# Allegro board ILI9488_TEST_V10A.brd
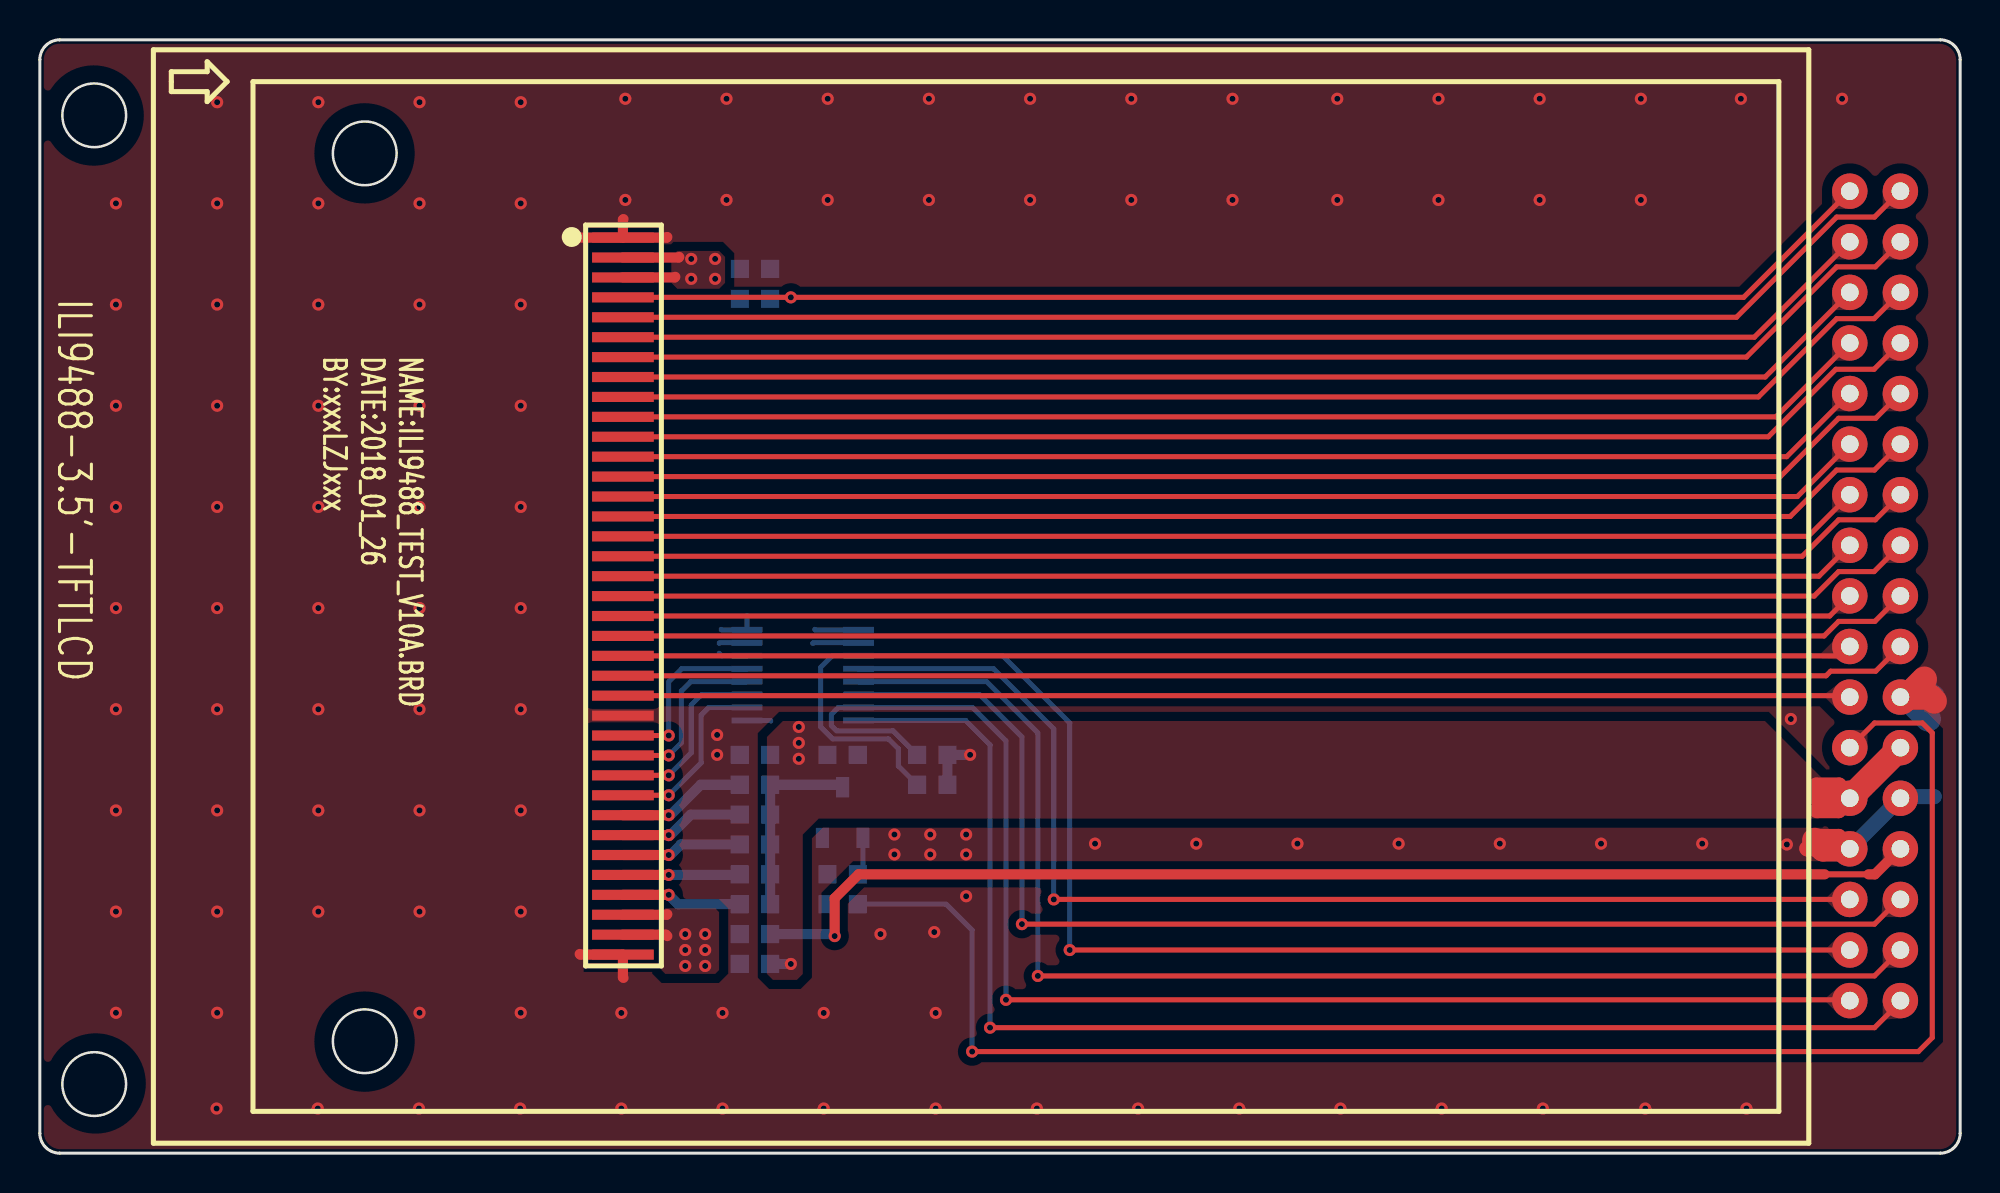
[diagram p0: board, top side]
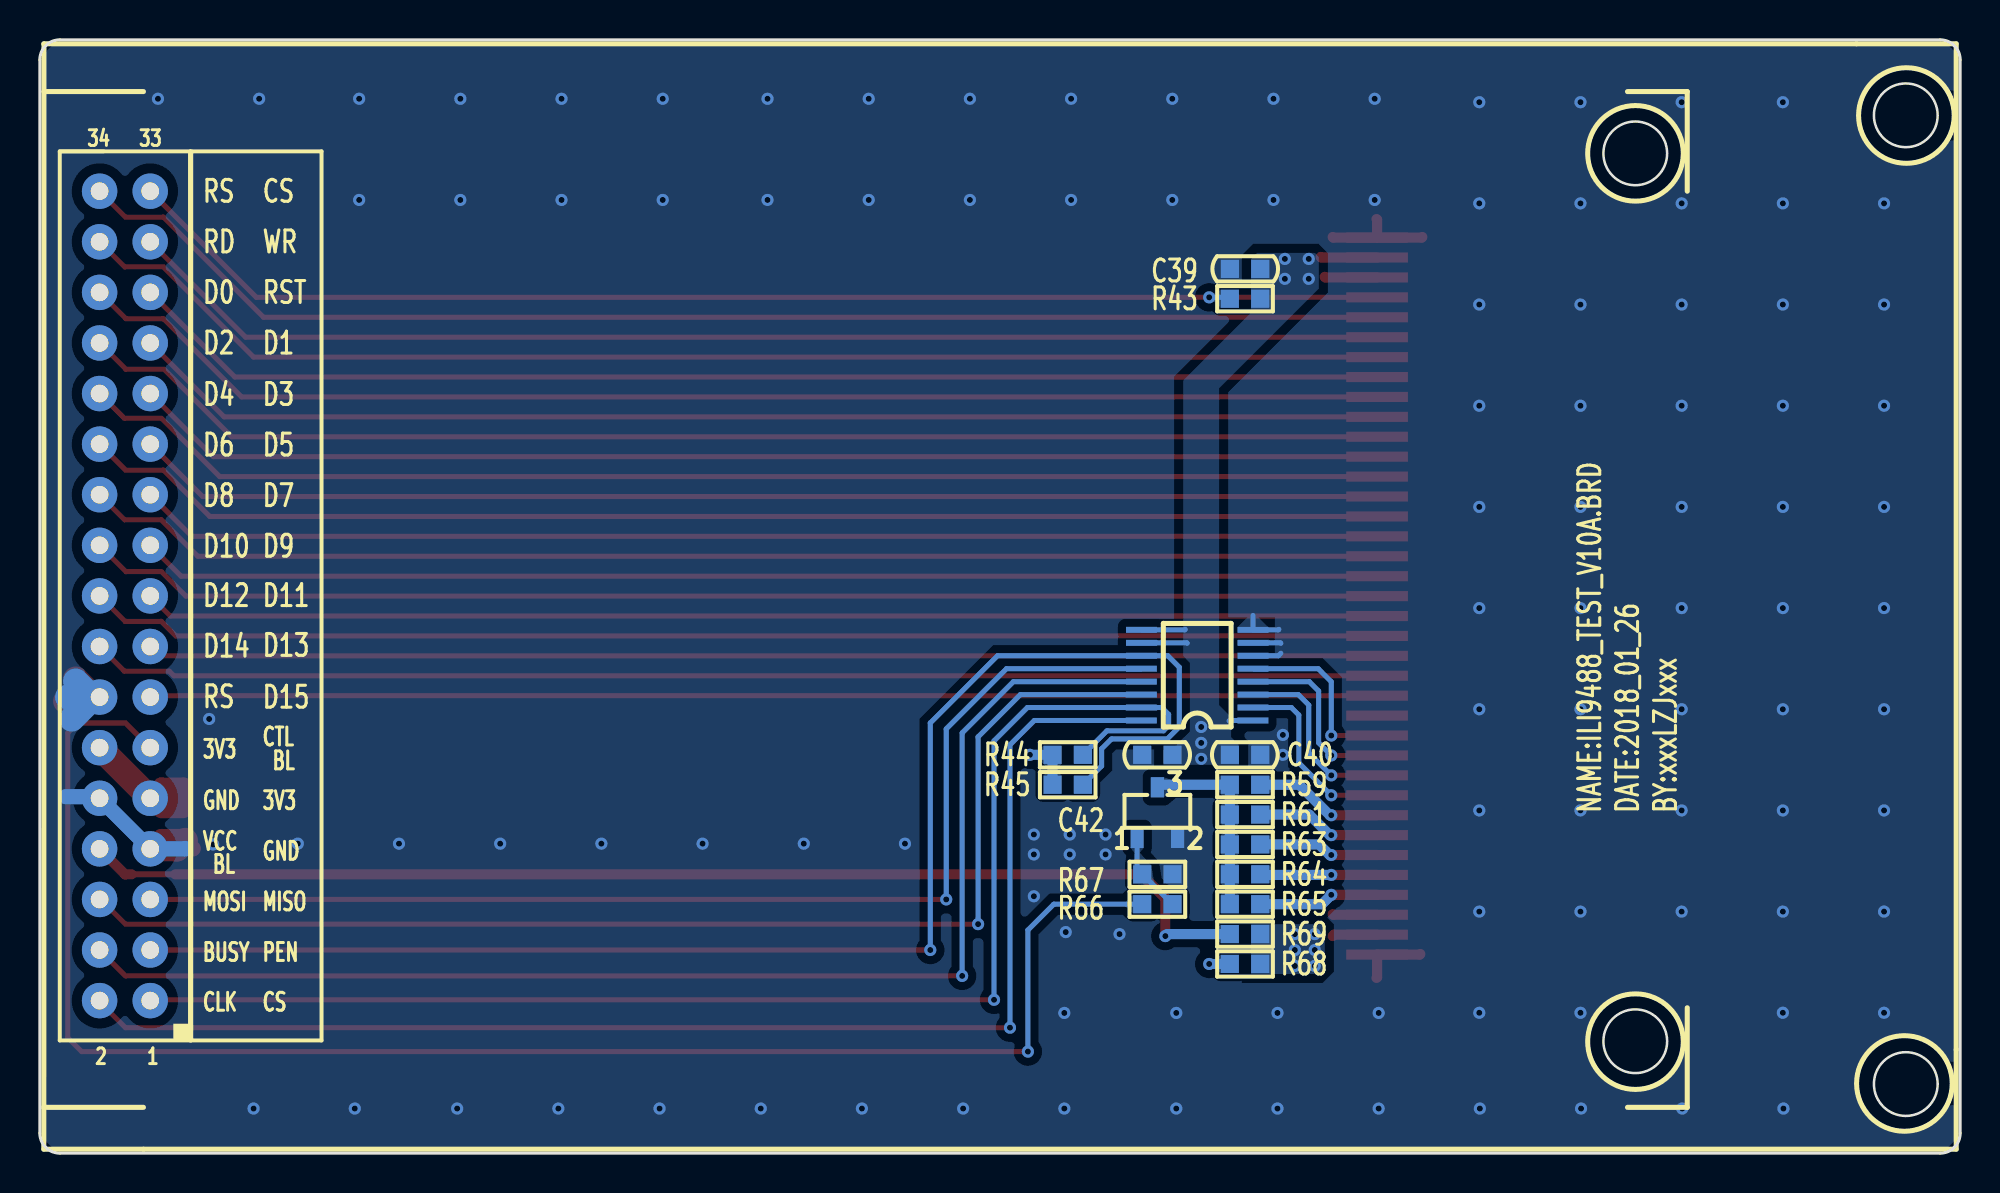
[diagram p1: board, bottom side, seen from below]

Outline 96.4 x 55.9 mm; copper layers: TOP, BOTTOM. Coordinates in mm from the lower left corner of the outline.
Outline path: 0,54.9 0,1 arc(0.29,0.29) 1,0 95.4,0 arc(96.11,0.29) 96.4,1 96.4,54.9 arc(96.11,55.61) 95.4,55.9 1,55.9 arc(0.29,55.61) 0,54.9

## Design rules (mm)
constraint set DEFAULT: min track width 0.203, pair gap 0.203

## Placement (name value [footprint] x y rotation side)
C39  0.1uF_50V  [CC0603]  35.9 44.4 180 bottom
C40  0.1uF_50V  [CC0603]  35.9 20 0 bottom
C42  0.1uF_50V  [CC0603]  40.3 20 0 bottom
J4  HEADER17X2_2R54  [TFTLCD_3R5]  93.4 48.3 180 bottom
NOREF  -  []  0 0 0 top
NOREF#2  -  []  0 0 90 top
Q3  S8050  [SOT23_123]  40.3 17.1 180 bottom
R43  100K  [RC0603]  35.9 42.9 0 bottom
R44  100K  [RC0603]  44.8 20 180 bottom
R45  100K  [RC0603]  44.8 18.5 180 bottom
R59  10R  [RC0603]  35.9 18.5 0 bottom
R61  10R  [RC0603]  35.9 17 0 bottom
R63  10R  [RC0603]  35.9 15.5 0 bottom
R64  10R  [RC0603]  35.9 14 0 bottom
R65  10R  [RC0603]  35.9 12.5 0 bottom
R66  1K  [RC0603]  40.3 12.5 180 bottom
R67  100K  [RC0603]  40.3 14 0 bottom
R68  0R/NI  [RC0603]  35.9 9.5 180 bottom
R69  0R  [RC0603]  35.9 11 180 bottom
U15  -  [TFT-3R5]  5.8 55.3 270 top
U16  XPT2046  [TSSOP-16]  38.3 24 90 bottom

## Library data of the parts
C39 C40 C42 = CAP NP
J4 = CONN RCPT 17x2
Q3 = L14G1/TO_1
R43-R45 R59 R61 R63-R69 = R_Generic
U15 = TFT-3R2
U16 = XPT2046

## Footprints (pads in the part's own frame, mm; a bottom-side part is the same pattern mirrored in y, then rotated)
CC0603
  rect 0.914x0.914 smd: 1(-0.762,0) 2(0.762,0)
RC0603
  rect 0.914x0.914 smd: 1(-0.762,0) 2(0.762,0)
SOT23_123
  rect 0.66x1.016 smd: 1(-1.016,-1.27) 2(1.016,-1.27) 3(0,1.27)
TFT-3R5
  rect 0.508x3.099 smd: 1(9.33,23.47) 2(10.33,23.47) 3(11.33,23.47) 4(12.33,23.47) 5(13.33,23.47) 6(14.33,23.47) 7(15.33,23.47) 8(16.33,23.47) 9(17.33,23.47) 10(18.33,23.47) 11(19.33,23.47) 12(20.33,23.47) 13(21.33,23.47) 14(22.33,23.47) 15(23.33,23.47) 16(24.33,23.47) 17(25.33,23.47) 18(26.33,23.47) 19(27.33,23.47) 20(28.33,23.47) 21(29.33,23.47) 22(30.33,23.47) 23(31.33,23.47) 24(32.33,23.47) 25(33.33,23.47) 26(34.33,23.47) 27(35.33,23.47) 28(36.33,23.47) 29(37.33,23.47) 30(38.33,23.47) 31(39.33,23.47) 32(40.33,23.47) 33(41.33,23.47) 34(42.33,23.47) 35(43.33,23.47) 36(44.33,23.47) 37(45.33,23.47)
TFTLCD_3R5
  round 1.778 hole 0.889: 1(2.54,-40.64) 2(0,-40.64) 3(2.54,-38.1) 4(0,-38.1) 5(2.54,-35.56) 6(0,-35.56) 7(2.54,-33.02) 8(0,-33.02) 9(2.54,-30.48) 10(0,-30.48) 11(2.54,-27.94) 12(0,-27.94) 13(2.54,-25.4) 14(0,-25.4) 15(2.54,-22.86) 16(0,-22.86) 17(2.54,-20.32) 18(0,-20.32) 19(2.54,-17.78) 20(0,-17.78) 21(2.54,-15.24) 22(0,-15.24) 23(2.54,-12.7) 24(0,-12.7) 25(2.54,-10.16) 26(0,-10.16) 27(2.54,-7.62) 28(0,-7.62) 29(2.54,-5.08) 30(0,-5.08) 31(2.54,-2.54) 32(0,-2.54) 33(2.54,0) 34(0,0)
TSSOP-16
  rect 0.3x1.55 smd: 1(-2.275,-2.8) 2(-1.625,-2.8) 3(-0.975,-2.8) 4(-0.325,-2.8) 5(0.325,-2.8) 6(0.975,-2.8) 7(1.625,-2.8) 8(2.275,-2.8) 9(2.275,2.8) 10(1.625,2.8) 11(0.975,2.8) 12(0.325,2.8) 13(-0.325,2.8) 14(-0.975,2.8) 15(-1.625,2.8) 16(-2.275,2.8)

## Nets
GND: C39.1 C40.1 C42.2 J4.7 J4.10 J4.14 Q3.2(E) R67.1 U15.1 U15.25 U15.37 U16.6 U16.7 U16.8
VCC_3.3V: C39.2 C40.2 C42.1 J4.9 J4.12 R43.1 R44.1 R45.1 R68.1 U15.2 U15.3 U16.1 U16.9 U16.10
VCC_BL: J4.8 R69.1
BL_CTL: J4.11 R66.1
LCD_CS: J4.33 R43.2 U15.4
LCD_D0: J4.30 U15.9
LCD_D1: J4.27 U15.10
LCD_D2: J4.28 U15.11
LCD_D3: J4.25 U15.12
LCD_D4: J4.26 U15.13
LCD_D5: J4.23 U15.14
LCD_D6: J4.24 U15.15
LCD_D7: J4.21 U15.16
LCD_D8: J4.22 U15.17
LCD_D9: J4.19 U15.18
LCD_D10: J4.20 U15.19
LCD_D11: J4.17 U15.20
LCD_D12: J4.18 U15.21
LCD_D13: J4.15 U15.22
LCD_D14: J4.16 U15.23
LCD_D15: J4.13 U15.24
LCD_RD: J4.32 U15.7
LCD_RS: J4.34 U15.5
LCD_RST: J4.29 U15.8
LCD_WR: J4.31 U15.6
LED-1: R59.1 U15.30
LED-2: R61.1 U15.31
LED-3: R63.1 U15.32
LED-4: R64.1 U15.33
LED-5: R65.1 U15.34
T_BUSY: J4.4 U16.13
T_CLK: J4.2 U16.16
T_CS: J4.1 R44.2 U16.15
T_MISO: J4.5 U16.12
T_MOSI: J4.6 U16.14
T_PEN: J4.3 R45.2 U16.11
X+: U15.29 U16.2
X-: U15.27 U16.4
Y+: U15.28 U16.3(YP)
Y-: U15.26(Y-) U16.5
N17012325: Q3.3 R59.2 R61.2 R63.2 R64.2 R65.2
N17013801: R68.2 R69.2 U15.35 U15.36
N17014487: Q3.1 R66.2 R67.2

## Via types
v1: diameter 0.61, hole 0.305, TOP to BOTTOM, 145 vias

## Routing (per net, layer and track width the routed paths; a pad name or vN(x,y) marks a point on that pad's centre or on a via; arc(x,y) is an arc through that point)
GND: length 33.1
  TOP w0.508: 31.5,46 31.47,45.97 U15.1 ; 27,46 27.03,45.97 U15.1 ; U15.1 29.27,46.87 29.3,46.9 ; 27.1,10 27.13,9.97 U15.37 29.27,8.83 29.3,8.8
  TOP w0.762: J4.7 90.86,15.34 90.3,15.9 89.3,15.9 89.1,15.7 ; 88.7,15.3 88.72,15.28 89.52,15.28
  TOP w1.27: 93.7,22.9 94.9,22.9 95.1,22.7 ; 93.7,22.9 94.6,23.8 ; 93.7,22.9 J4.14 ; J4.7 89.52,15.28 89.1,15.7
  BOTTOM w0.254: U16.6 34.23,24.98 34.1,25.1 ; 35.5,27 U16.8 34.23,26.27 34.2,26.3 ; 34.1,25.6 34.12,25.62 U16.7
  BOTTOM w0.762: 89.1,15.3 89.12,15.28 J4.7 J4.10 93.48,17.9 95.1,17.9
  BOTTOM w1.27: 93.7,22.9 94.8,21.8 ; 93.7,22.9 J4.14 ; 93.7,22.9 93.8,22.9 ; 93.8,22.9 95,22.9 ; 93.8,22.9 94.6,23.7
  vias: v1(3.82,47.69) v1(3.82,42.61) v1(3.82,37.53) v1(3.82,32.45) v1(3.82,27.37) v1(3.82,22.29) v1(3.82,17.21) v1(3.82,12.13) v1(3.82,7.05) v1(8.9,52.77) v1(8.9,47.69) v1(8.9,42.61) v1(8.9,37.53) v1(8.9,32.45) v1(8.9,27.37) v1(8.9,22.29) v1(8.9,17.21) v1(8.9,12.13) v1(8.9,7.05) v1(8.87,2.24) v1(13.98,52.77) v1(13.98,47.69) v1(13.98,42.61) v1(13.98,37.53) v1(13.98,32.45) v1(13.98,27.37) v1(13.98,22.29) v1(13.98,17.21) v1(13.98,12.13) v1(13.95,2.24) v1(19.03,2.24) v1(19.06,52.77) v1(19.06,47.69) v1(19.06,42.61) v1(19.06,37.53) v1(19.06,32.45) v1(19.06,27.37) v1(19.06,22.29) v1(19.06,17.21) v1(19.06,12.13) v1(19.06,7.05) v1(24.14,52.77) v1(24.14,47.69) v1(24.14,42.61) v1(24.14,37.53) v1(24.14,32.45) v1(24.14,27.37) v1(24.14,22.29) v1(24.14,17.21) v1(24.14,12.13) v1(24.14,7.05) v1(24.11,2.24) v1(29.19,7.04) v1(29.19,2.24) v1(29.39,52.94) v1(29.39,47.86) v1(34,21) v1(34,20) v1(34.27,7.04) v1(34.27,2.24) v1(34.47,52.94) v1(34.47,47.86) v1(39.35,7.04) v1(39.35,2.24) v1(39.55,52.94) v1(39.55,47.86) v1(42.2,11) v1(42.9,16) v1(42.9,15) v1(44.63,52.94) v1(44.63,47.86) v1(44.7,16) v1(44.7,15) v1(44.9,11.1) v1(44.97,7.04) v1(44.97,2.24) v1(46.5,16) v1(46.5,15) v1(46.5,12.9) v1(49.71,52.94) v1(49.71,47.86) v1(50.05,2.24) v1(52.97,15.54) v1(54.79,52.94) v1(54.79,47.86) v1(55.13,2.24) v1(58.05,15.54) v1(59.87,52.94) v1(59.87,47.86) v1(60.21,2.24) v1(63.13,15.54) v1(65.13,52.94) v1(65.13,47.86) v1(65.29,2.24) v1(68.21,15.54) v1(70.21,52.94) v1(70.21,47.86) v1(70.37,2.24) v1(73.29,15.54) v1(75.29,52.94) v1(75.29,47.86) v1(75.45,2.24) v1(78.37,15.54) v1(80.37,52.94) v1(80.37,47.86) v1(80.59,2.24) v1(83.45,15.54) v1(85.39,52.94) v1(85.67,2.24) v1(87.7,15.5) v1(87.9,21.8) v1(90.47,52.94)
VCC_3.3V: length 24.2
  TOP w0.508: 31.9,44 31.87,43.97 U15.3 ; 32.1,45 32.07,44.97 U15.2
  TOP w0.762: J4.9 89.22,17.82 89.2,17.8 ; J4.9 90.86,17.76 90.3,17.2 89.2,17.2 ; J4.9 90.86,17.94 90.32,18.48 89.18,18.48 89.1,18.4
  TOP w1.27: J4.12 J4.9
  BOTTOM w0.254: U16.9 38.92,26.27 38.9,26.3 ; U16.10 38.83,25.62 38.8,25.6 ; 36.7,21.7 36.67,21.73 U16.1
  BOTTOM w0.508: v1(46.7,20) R44.1 R45.1 ; R68.1 v1(37.7,9.5)
  vias: v1(32.7,44.9) v1(32.7,43.9) v1(33.9,44.9) v1(33.9,43.9) v1(38.1,21.4) v1(38.1,20.6) v1(38.1,19.8)
VCC_BL: length 59.7
  TOP w0.3: 89.6,14 91.8,14
  TOP w0.508: J4.8 92.12,14 91.8,14 ; v1(39.9,10.9) 39.9,12.8 41.1,14 89.6,14
  BOTTOM w0.508: R69.1 39.8,11 v1(39.9,10.9)
BL_CTL: length 81
  TOP w0.254: v1(46.8,5.1) 94.3,5.1 95,5.8 95,21.1 94.5,21.6 92.1,21.6 J4.11
  BOTTOM w0.254: R66.1 45.5,12.5 46.8,11.2 v1(46.8,5.1)
LCD_CS: length 64.9
  TOP w0.254: U15.4 v1(37.7,42.97) 85.53,42.97 J4.33
  BOTTOM w0.254: R43.2 36.73,42.97 v1(37.7,42.97)
LCD_D0: length 66.3
  TOP w0.254: U15.9 86.27,37.97 90.2,41.9 92.08,41.9 J4.30
LCD_D1: length 63.1
  TOP w0.254: J4.27 87.15,36.97 U15.10
LCD_D2: length 66.1
  TOP w0.254: U15.11 86.77,35.97 90.16,39.36 92.08,39.36 J4.28
LCD_D3: length 62.9
  TOP w0.254: J4.25 87.69,34.97 U15.12
LCD_D4: length 65.9
  TOP w0.254: J4.26 92.16,36.9 90.3,36.9 87.37,33.97 U15.13
LCD_D5: length 62.7
  TOP w0.254: U15.14 88.23,32.97 J4.23
LCD_D6: length 65.6
  TOP w0.254: J4.24 92.1,34.3 90.2,34.3 87.87,31.97 U15.15
LCD_D7: length 62.5
  TOP w0.254: J4.21 88.77,30.97 U15.16
LCD_D8: length 65.4
  TOP w0.254: U15.17 88.47,29.97 90.3,31.8 92.14,31.8 J4.22
LCD_D9: length 62.2
  TOP w0.254: J4.19 89.31,28.97 U15.18
LCD_D10: length 65.2
  TOP w0.254: J4.20 92.08,29.2 90.3,29.2 89.07,27.97 U15.19
LCD_D11: length 62
  TOP w0.254: J4.17 89.85,26.97 U15.20
LCD_D12: length 65
  TOP w0.254: J4.18 92.12,26.7 90.3,26.7 89.57,25.97 U15.21
LCD_D13: length 61.8
  TOP w0.254: J4.15 90.39,24.97 U15.22
LCD_D14: length 64.7
  TOP w0.254: J4.16 92.16,24.2 89.9,24.2 89.67,23.97 U15.23
LCD_D15: length 61.6
  TOP w0.254: U15.24 90.79,22.97 J4.13
LCD_RD: length 66.5
  TOP w0.254: U15.7 85.67,39.97 90.2,44.5 92.14,44.5 J4.32
LCD_RS: length 66.8
  TOP w0.254: U15.5 85.17,41.97 90.2,47 92.1,47 J4.34
LCD_RST: length 63.4
  TOP w0.254: U15.8 86.61,38.97 J4.29
LCD_WR: length 63.6
  TOP w0.254: J4.31 86.07,40.97 U15.6
LED-1: length 6.5
  TOP w0.508: U15.30 v1(31.57,16.97)
  BOTTOM w0.508: R59.1 33.18,18.5 31.65,16.97 v1(31.57,16.97)
LED-2: length 6.3
  TOP w0.508: U15.31 v1(31.57,15.97)
  BOTTOM w0.508: v1(31.57,15.97) 31.65,15.97 32.68,17 R61.1
LED-3: length 6.1
  TOP w0.508: U15.32 v1(31.57,14.97)
  BOTTOM w0.508: v1(31.57,14.97) 31.65,14.97 32.18,15.5 R63.1
LED-4: length 5.9
  TOP w0.508: U15.33 v1(31.57,13.97)
  BOTTOM w0.508: v1(31.57,13.97) 35.11,13.97 R64.1
LED-5: length 6.1
  TOP w0.508: U15.34 v1(31.57,12.97)
  BOTTOM w0.508: v1(31.57,12.97) 32.04,12.5 R65.1
T_BUSY: length 66.1
  TOP w0.254: v1(50.1,8.9) 92.1,8.9 J4.4
  BOTTOM w0.254: U16.13 47.52,23.68 50.1,21.1 v1(50.1,8.9)
T_CLK: length 67.6
  TOP w0.254: J4.2 93.4,7.6 92.1,6.3 v1(47.7,6.3)
  BOTTOM w0.254: v1(47.7,6.3) 47.7,20.5 46.48,21.73 U16.16
T_CS: length 70.5
  TOP w0.254: J4.1 90.82,7.7 v1(48.5,7.7)
  BOTTOM w0.254: R44.2 42.83,21.21 39.99,21.21 39.74,21.46 39.74,22.03 40.08,22.38 U16.15 46.83,22.38 48.5,20.7 v1(48.5,7.7)
T_MISO: length 59.6
  TOP w0.254: J4.5 v1(50.9,12.74)
  BOTTOM w0.254: U16.12 47.88,24.32 50.9,21.3 v1(50.9,12.74)
T_MOSI: length 63.1
  TOP w0.254: v1(49.3,11.5) 92.1,11.5 93.34,12.74 J4.6
  BOTTOM w0.254: U16.14 47.17,23.02 49.3,20.9 v1(49.3,11.5)
T_PEN: length 74.2
  TOP w0.254: J4.3 v1(51.7,10.2)
  BOTTOM w0.254: R45.2 43.1,19.44 43.1,20.3 42.6,20.8 39.8,20.8 39.2,21.4 39.2,24.4 39.77,24.98 U16.11 48.33,24.98 51.7,21.6 v1(51.7,10.2)
X+: length 9.5
  TOP w0.254: U15.29 v1(31.57,17.97)
  BOTTOM w0.254: U16.2 33.58,22.38 33.2,22 33.2,19.6 v1(31.57,17.97)
X-: length 9.3
  TOP w0.254: U15.27 v1(31.57,19.97)
  BOTTOM w0.254: v1(31.57,19.97) 32.2,20.61 32.2,23.2 32.67,23.68 U16.4
Y+: length 9.3
  TOP w0.254: U15.28 v1(31.57,18.97)
  BOTTOM w0.254: U16.3 33.23,23.02 32.7,22.5 32.7,20.1 v1(31.57,18.97)
Y-: length 9.2
  TOP w0.254: U15.26 v1(31.57,20.97)
  BOTTOM w0.254: U16.5 32.23,24.32 31.57,23.67 v1(31.57,20.97)
N17012325: length 9.7
  BOTTOM w0.508: Q3.3 40.17,18.5 R59.2 R61.2 R63.2 R64.2 R65.2
N17013801: length 4.5
  TOP w0.508: 31.5,10.9 31.43,10.97 U15.36 ; U15.35 31.47,11.97 31.5,12
  vias: v1(32.4,11) v1(32.4,10.2) v1(32.4,9.4) v1(33.4,11) v1(33.4,10.2) v1(33.4,9.4)
N17014487: length 4.1
  BOTTOM w0.254: R66.2 41.04,14 R67.2 41.32,14.25 Q3.1

## Copper pours and planes (outline as drawn; the poured copper is in the pictures)
GND on TOP: 96.2,54.9 95.95,55.45 95.4,55.7 1,55.7 0.43,55.47 0.2,54.9 0.2,1 0.45,0.45 1,0.2 95.4,0.2 95.95,0.45 96.2,1 ; 13 cut-outs
GND on BOTTOM: 96.2,54.9 95.95,55.45 95.4,55.7 1,55.7 0.43,55.47 0.2,54.9 0.2,1 0.45,0.45 1,0.2 95.4,0.2 95.95,0.45 96.2,1 ; 18 cut-outs
VCC_3.3V on TOP: 32,45.3 34.1,45.3 34.4,45 34.4,43.7 34.1,43.4 32,43.4 31.7,43.7 31.7,45
VCC_3.3V on TOP: 37.3,21.7 86.6,21.7 89.7,18.6 89.7,17.2 89.3,16.8 39.1,16.8 38.3,16 38.3,9 38,8.7 36.8,8.7 36.5,9 36.5,20.9
VCC_3.3V on BOTTOM: 36.2,19.5 40,19.5 40,20.3 39,21.3 39,38.8 35.6,42.2 35.6,44.9 35.3,45.2 32.4,45.2 32.2,45 32.2,43.4 37.2,38.4 37.2,22.5 36.6,21.9 36.6,20.9 36.2,20.5
N17013801 on TOP: 31.4,12.3 33.9,12.3 34.1,12.1 34.1,9.2 33.9,9 31.4,9 31.2,9.2 31.2,12.1
N17013801 on BOTTOM: 35.6,11.5 32.1,11.5 31.9,11.3 31.9,9.3 32.2,9 35.6,9

Small or netless copper shapes (teardrops, artwork), in the pictures only: 42 on TOP, 60 on BOTTOM

## Text on the board
Ref Des/Silkscreen Bottom: BL | CTL | 3V3 | GND | MISO | PEN | CS | VCC | MOSI | BUSY | CLK | WR | RST | D1 | D3 | D5 | D7 | D9 | D11 | D13 | D15 | RS | RD | D0 | D2 | D4 | D6 | D8 | D10 | D12 | D14 | BY:xxxLZJxxx | DATE:2018_01_26 | NAME:ILI9488_TEST_V10A.BRD
Ref Des/Silkscreen Top: BY:xxxLZJxxx | DATE:2018_01_26 | NAME:ILI9488_TEST_V10A.BRD | ILI9488-3.5'-TFTLCD
DEVICE_TYPE_BOTTOM: FIGURE | FINISHED_SIZE | 0.3048 | 0.889 | DRILL CHART: TOP to BOTTOM | ALL UNITS ARE IN MILLIMETERS | PLATED | QTY | 145 | 34
